# Altium PCB Lamp fader.PcbDoc
Units mm, origin at the board's own origin, x right, y up, seen from the top; angles counter-clockwise.
Board outline 215 x 144 mm, 2 copper layers (Top Layer, Bottom Layer); 21 components, 12 nets, 55 pads, 0 vias.
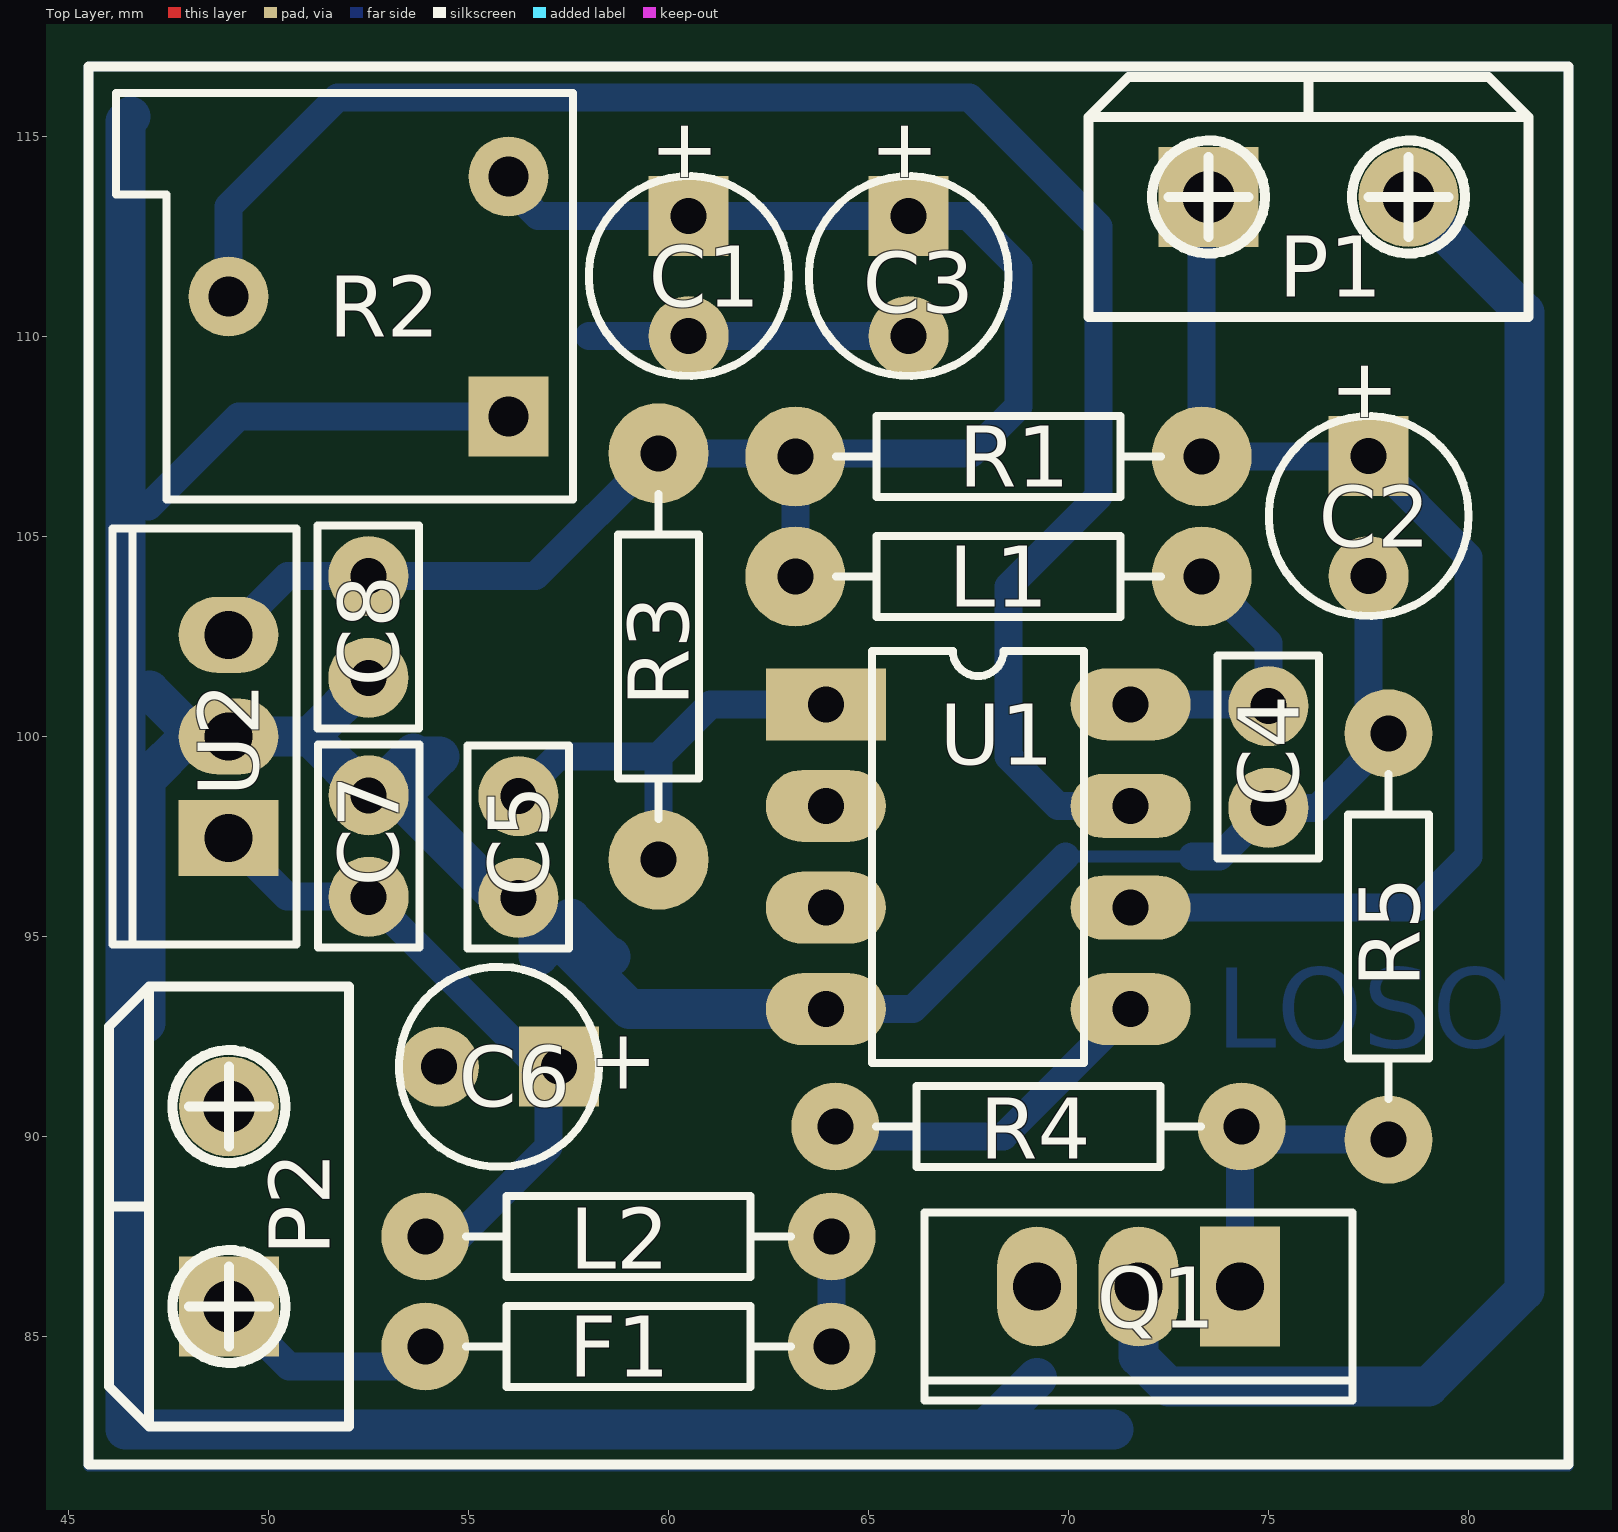
[diagram p0: Top Layer view]
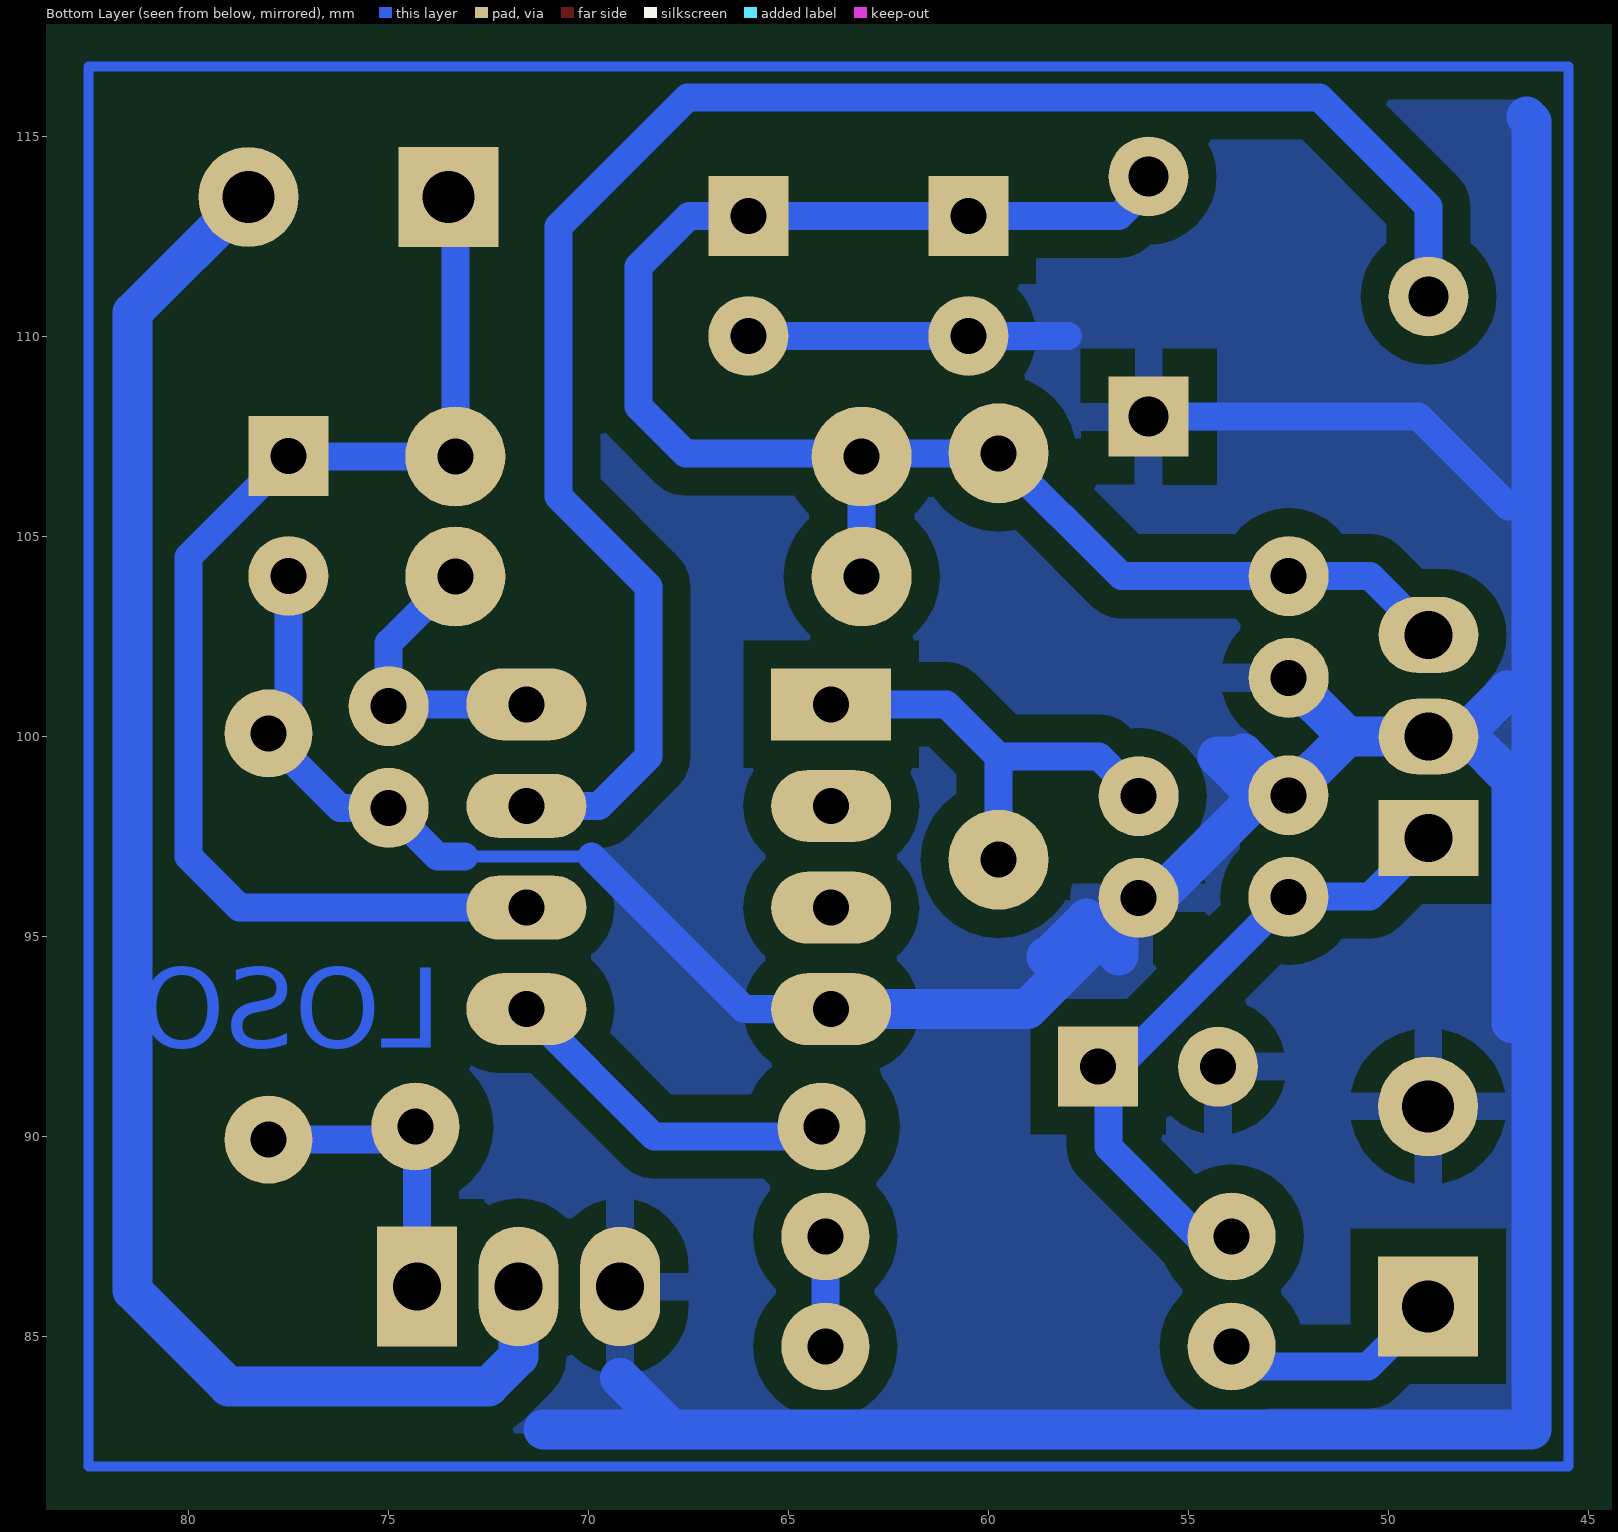
[diagram p1: Bottom Layer view, seen from below]

## Layer stack, top to bottom
Top Layer: signal copper 0.0356
Dielectric: dielectric 0.32, FR-4, Dk 4.8
Bottom Layer: signal copper 0.0356

## Board outline
14,178 229,178 229,34 14,34

## Design rules (kind name [scope] priority, off if disabled: settings)
Clearance [All] p1: gap=0.3
ComponentClearance [All] p1: gap=0.1 collisioncheckmode=3 verticalgap=0.1
PolygonConnect [All] p1: connectstyle=Relief reliefconductorwidth=0.7 reliefentries=4 polygonreliefangle="90 Angle"
RoutingVias [All] p1: holewidth=0.711 width=1.27 viastyle="Through Hole" minholewidth=0.711 minwidth=1.27 maxholewidth=0.711 maxwidth=1.27
SolderMaskExpansion [All] p1: expansion=0.102
TestPointUsage [All] p1: valid=0 allowmultiple=FALSE
Testpoint [All] p1: side=15 testpointundercomponent=TRUE minsize=1.016 maxsize=2.54 preferedsize=1.524 minholesize=0 maxholesize=1.016 preferedholesize=0.813 testpointgrid=0.025 style=1023 order=0123456789
Width [All] p1: maxlimit=1 minlimit=0.25 preferedwidth=0.254 toplayer_minwidth=0.254 toplayer_maxwidth=0.254 bottomlayer_prefwidth=0.5 minimp=50.000000 maximp=50.000000 favimp=50.000000
18 further rules are at their usual default settings.

## Components (designator, comment, footprint, x,y, rotation, side; value= is the part's Value field where it differs from the comment)
C1 "Cap Pol1" CAPPR2-5X6.8 60.5,111.5 r270 top
C2 "Cap Pol1" CAPPR2-5X6.8 77.5,105.5 r270 top
C3 "Cap Pol1" CAPPR2-5X6.8 66,111.5 r270 top
C4 "Cap" rad-0.1 75,99.5 r270 top
C5 "Cap" rad-0.1 56.25,97.25 r270 top
C6 "Cap Pol1" CAPPR2-5X6.8 55.75,91.75 r180 top
C7 "Cap" rad-0.1 52.5,97.25 r90 top
C8 "Cap" rad-0.1 52.5,102.75 r270 top
F1 "0.25A@12V  Fuse" AXIAL-0.4#1 59,84.75 r0 top
L1 "Inductor" axial-0.4#1 68.25,104 r180 top
L2 "[Optional]" axial-0.4#2 59,87.5 r180 top
P1 "Lamp & Switch" Cannector-2 82.5,113.5 r0 top
P2 "Power Input" Cannector-2 49,94.75 r90 top
Q1 "IRF840 and IRF630 Tested" TO-220AB 71.75,86.25 r180 top
R1 "Res2" AXIAL-0.4#2 68.25,107 r180 top
R2 "RPot" VR4 51.25,111 r90 top
R3 "Res2" AXIAL-0.4#2 59.75,102 r90 top
R4 "Res2" AXIAL-0.4#1 69.25,90.25 r180 top
R5 "Res2" AXIAL-0.4#1 78,95 r90 top
U1 "ATtiny13-20PU" DIP-8 67.75,97 r270 top
U2 "L7805CV" TO220ABN 49,100 r90 top

## Footprints (in the part's own frame and the unit in brackets; to place one, negate y for a bottom-side part, rotate by r counter-clockwise, add the part's x,y. Pads: shape width x height; smd on the part's side, far side on the other; paste and mask are expansions set on the pad)
AXIAL-0.4#1 [mm]
  round 2.2 hole 0.9: 1(-5.08,0) 2(5.08,0)
  silkscreen extent -4.06,-1.02 4.06,1.02
AXIAL-0.4#2 [mm] "Resistor; 2 Leads"
  round 2.5 hole 0.9: 1(-5.08,0) 2(5.08,0)
  silkscreen extent -4.06,-1.02 4.06,1.02
axial-0.4#1 [mm]
  round 2.5 hole 0.9: 1(-5.08,0) 2(5.08,0)
  silkscreen extent -4.06,-1.02 4.06,1.02
axial-0.4#2 [mm]
  round 2.2 hole 0.9: 1(-5.08,0) 2(5.08,0)
  silkscreen extent -4.06,-1.02 4.06,1.02
Cannector-2 [mm] "Power connectro with screw"
  rect 2.5x2.5 hole 1.3: 1(-8.999,-0.011)
  round 2.5 hole 1.3: 2(-3.999,-0.011)
  oval 1x0.75 on Top Overlay: 3(-8.999,-2.011) 3(-3.999,-2.011)
  silkscreen extent -12,-3.01 -1,2.99
CAPPR2-5X6.8 [mm]
  rect 2x2 hole 0.9: 1(-1.511,0.005)
  round 2 hole 0.9: 2(1.489,0.005)
  silkscreen extent -2.51,-2.49 2.49,2.51
DIP-8 [mm]
  rect 1.8x3 hole 0.9: 1(-3.804,-3.817)
  oval 1.8x3 hole 0.9: 2(-1.264,-3.817) 3(1.276,-3.817) 4(3.816,-3.817) 5(3.816,3.803) 8(-3.804,3.803)
  oval 1.6x3 hole 0.9: 6(1.276,3.803) 7(-1.264,3.803)
  silkscreen extent -5.14,-2.66 5.16,2.64
rad-0.1 [mm]
  round 2 hole 0.9: 1(-1.258,-0.005) 2(1.282,-0.005)
  silkscreen extent -2.53,-1.28 2.55,1.26
TO220ABN [mm] "TO, Thru-Hole, Vertical, Heatsink Mounted; 3 In-Line Leads; Pitch 2.54 mm; Pin sequence 1, 3, 2"
  rect 1.9x2.5 hole 1.2: 1(-2.54,0)
  oval 1.9x2.5 hole 1.2: 2(2.54,0) 3(0,0)
  silkscreen extent -5.2,-1.7 5.2,2.9
TO-220AB [mm] "TO, Thru-Hole, Vertical, Heatsink Mounted; 3 In-Line Leads; Pitch 2.54 mm"
  rect 2x3 hole 1.2 mask+0.102: 1(-2.54,0)
  oval 2x3 hole 1.2: 2(0,0) 3(2.54,0)
  silkscreen extent -5.35,-1.85 5.35,2.85
VR4 [mm]
  rect 2x2 hole 1: 1(-3,-4.75)
  round 2 hole 1: 2(3,-4.75) 3(0,2.25)
  silkscreen extent -5.07,-6.36 5.09,5.07

## Part data
C1 C2 C3 C6: "Polarized Capacitor (Radial)"
C4 C5 C7 C8: "Capacitor"
F1: library part "Fuse 1", "Fuse"
L2: library part Inductor, "Inductor"
P1 P2: library part "Header 2", "Header, 2-Pin"
Q1: library part IRF840, "HEXFET N-Channel Power MOSFET"
R1 R3 R4 R5: "Resistor"
R2: "Potentiometer"
U1: library part ATtiny13-20PI, "Atmel AVR 8-Bit Microcontroller"
U2: "Positive Voltage Regulator"

## Nets (pads, with @x,y where several pads share a name; then routed paths per layer and width w, separated by ;. In a path a pad name is that pad's centre, name@x,y a point inside that pad or via, vN(x,y) a via of type N, cw(c..) or ccw(c..) an arc to the next point about the centre after c; other vN are vias at no path point)
+5: C1.1 C3.1 C8.1 L1.2 R1.2 R2.2 R3.2 U2.2 | length 42.6
  Bottom Layer w0.7: U2.2 50.468,104.008 56.678,104.008 R3.2 67.58,107.08 68.75,108.25 68.75,111.75 67.489,113.011 C1.1 56.739,113.011 56,113.75 R2.2 ; R1.2@63.09,107.08 R1.2 L1.2
DOOR_SWITCH_N.C: C2.1 P1.1 R1.1 U1.6 | length 31
  Bottom Layer w0.7: U1.6 78.724,95.724 80,97 80,104.494 C2.1@77.494,107 ; P1.1 73.33,113.318 R1.1 C2.1@77.494,107 ; C2.1@77.739,107.011 C2.1 C2.1@77.494,107
GND: C1.2 C2.2 C3.2 C4.2 C5.2 C6.2 C7.2 C8.2 P2.2 Q1.3 R2.1 R5.2 U1.4 U2.3 | length 134.4
  Bottom Layer w0.3: 69.925,97 73.1,97
  Bottom Layer w0.7: 47,105.75 49.25,108 R2.1 ; C8.2@52.495,101.458 C8.2 ; 58.011,110.011 C3.2 ; U1.4 66.109,93.184 69.925,97 ; 73.1,97 73.776,97 74.946,98.17 C4.2@74.995,98.17 ; C4.2 76.218,98.218 78,100 R5.2 77.505,100.575 C2.2
  Bottom Layer w1: 46.55,115.5 46.427,115.377 46.427,82.677 71.123,82.677 ; 46.927,92.835 46.927,98.927 U2.3@48,100 ; 47.025,101.15 48.175,100 51.037,100 ; C8.2@52.495,101.458 51.037,100 ; C7.2@52.582,98.532 53.625,99.575 53.7,99.5 54.275,99.5 53.307,98.532 C7.2 51.037,100 ; C7.2@53.218,98.532 C5.2@55.782,95.968 ; C5.2 56.75,95.463 56.75,94.525 57.55,95.325 57.55,95.45 58.5,94.5 58.55,94.5 ; 57.219,94.994 59.029,93.184 U1.4 ; 67.927,82.677 69.21,83.96
LAMP: P1.2 Q1.2 | length 41.6
  Bottom Layer w0.7: P1.2@78.261,113.739 78.511,113.489 P1.2
  Bottom Layer w1: Q1.2 71.75,84.5 72.5,83.75 79,83.75 81.4,86.15 81.4,110.6 P1.2@78.511,113.489 ; P1.2 P1.2@78.506,113.484
NetC4_1: C4.1 L1.1 U1.8 | length 7.3
  Bottom Layer w0.7: U1.8 C4.1@74.949,100.804 ; L1.1 74.995,102.335 C4.1
NetC6_1: C6.1 C7.1 L2.2 U2.1 | length 16.7
  Bottom Layer w0.7: U2.1 50.46,96 52.497,96 C6.1@57.002,91.495 ; L2.2@53.92,87 54.261,87 57.002,89.741 C6.1@57.002,91.495 ; C6.1@57.261,91.495 C6.1@57.002,91.495
NetF1_1: F1.1 P2.1 | length 5.5
  Bottom Layer w0.7: P2.1 50.512,84.25 F1.1@53.92,84.25
NetF1_2: F1.2 L2.1 | length 2.8
  Bottom Layer w0.7: F1.2@64.08,84.25 L2.1@64.08,87
NetQ1_1: Q1.1 R4.1 R5.1 | length 7.4
  Bottom Layer w0.7: Q1.1 74.29,89.96 74.33,89.92 R5.1
PWM_OUT: R4.2 U1.5 | length 8.7
  Bottom Layer w0.7: R4.2@64.17,90 68.369,90 U1.5
RESET: C5.1 R3.1 U1.1 | length 11.2
  Bottom Layer w0.7: C5.1 57.236,99.5 59.75,99.5 ; R3.1 59.75,99.5 ; U1.1 61.054,100.804 59.75,99.5
TIME_ADJUST: R2.3 U1.7 | length 44.2
  Bottom Layer w0.7: R2.3 49,113.25 51.723,115.973 67.527,115.973 70.75,112.75 70.75,106 68.5,103.75 68.5,99.5 69.736,98.264 U1.7
pads on no net: P1.3 P2.3 U1.2 U1.3
copper on no net: | length 144
  Bottom Layer w0.254: 45.5,81.75 45.5,116.75 82.5,116.75 82.5,81.75 45.5,81.75

## Polygon pours and split planes (outlines as drawn)
GND on Bottom Layer (solid, remove dead copper): 82.5,116.75 82.5,81.75 45.5,81.75 45.5,116.75

## Other copper
Bottom Layer:
  text "LOSO" at 73.675,92.225 h2

## Silkscreen, mask and mechanical layers (free items; w line width, h text height)
Top Overlay:
  lines w0.254: 45.5,81.8 45.5,116.75 82.5,116.75 82.5,81.8 45.5,81.8 ; 45.5,81.8 45.5,81.8

## Text inside footprints (layer, text, board x,y; h text height)
C1: Top Overlay "+" at 59.755,115.486 h1.5 r270
C2: Top Overlay "+" at 76.755,109.486 h1.5 r270
C3: Top Overlay "+" at 65.255,115.486 h1.5 r270
C6: Top Overlay "+" at 59.736,92.495 h1.5 r180